# EAGLE board motor (EAGLE 9.7.0)
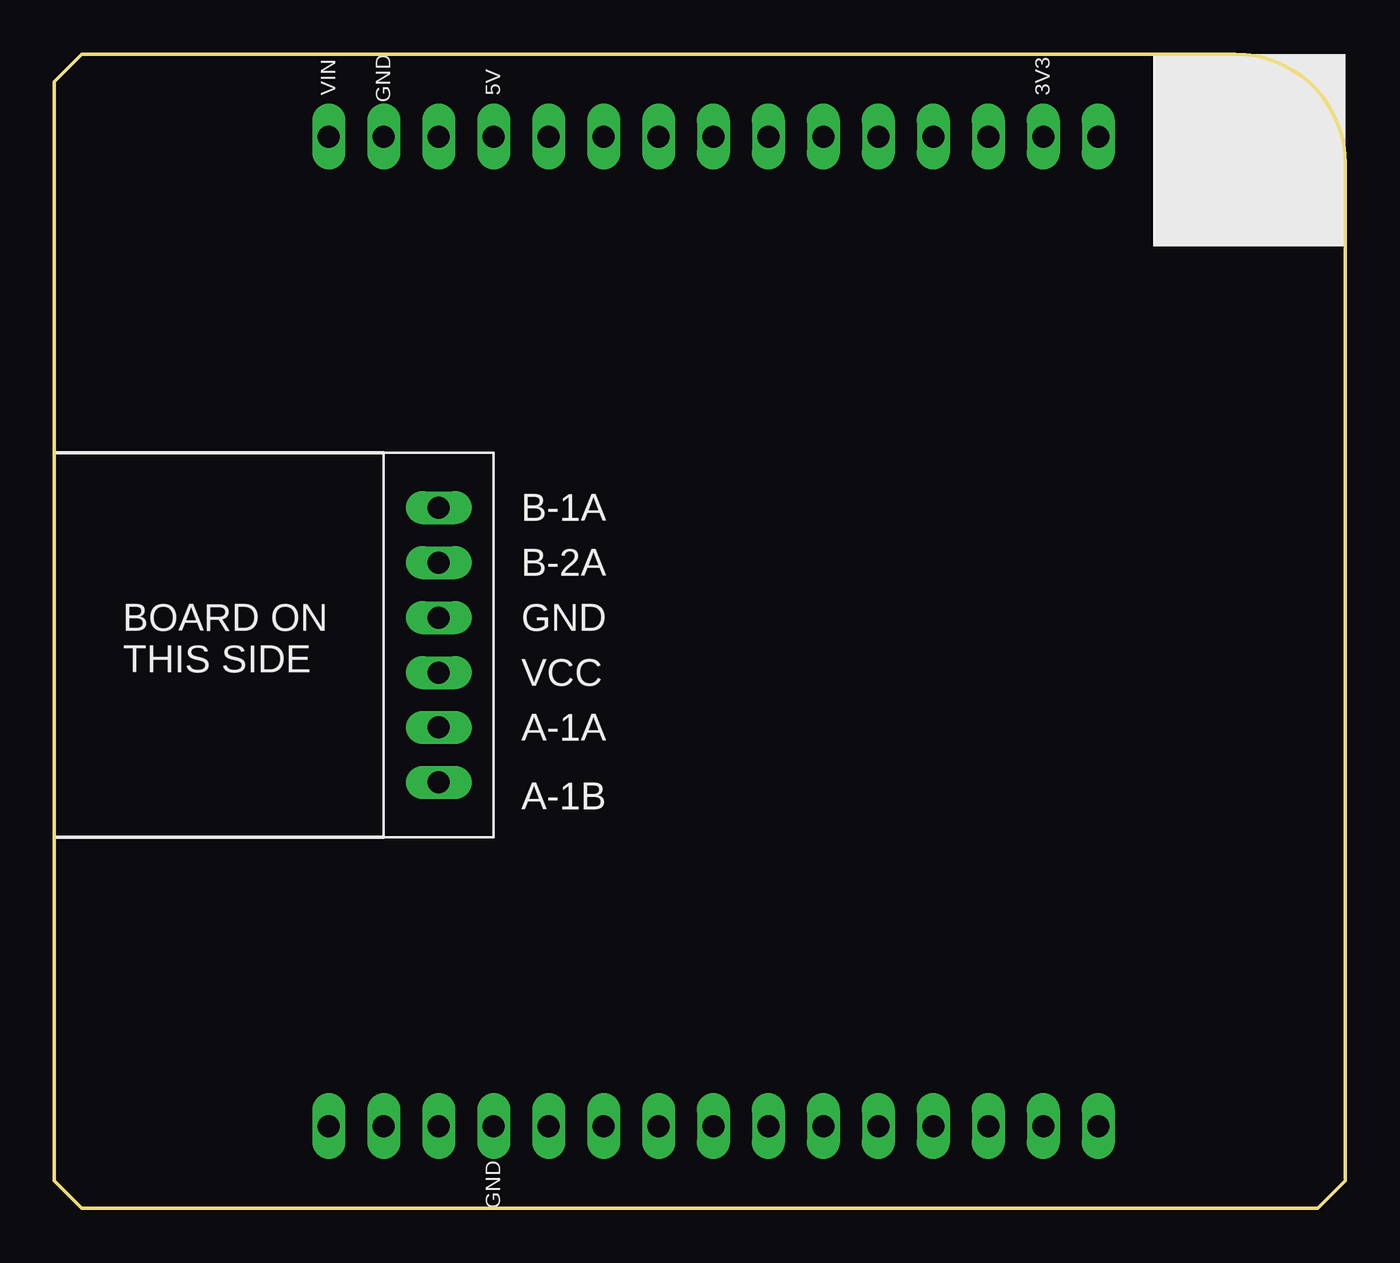
[diagram p0: board, top side]
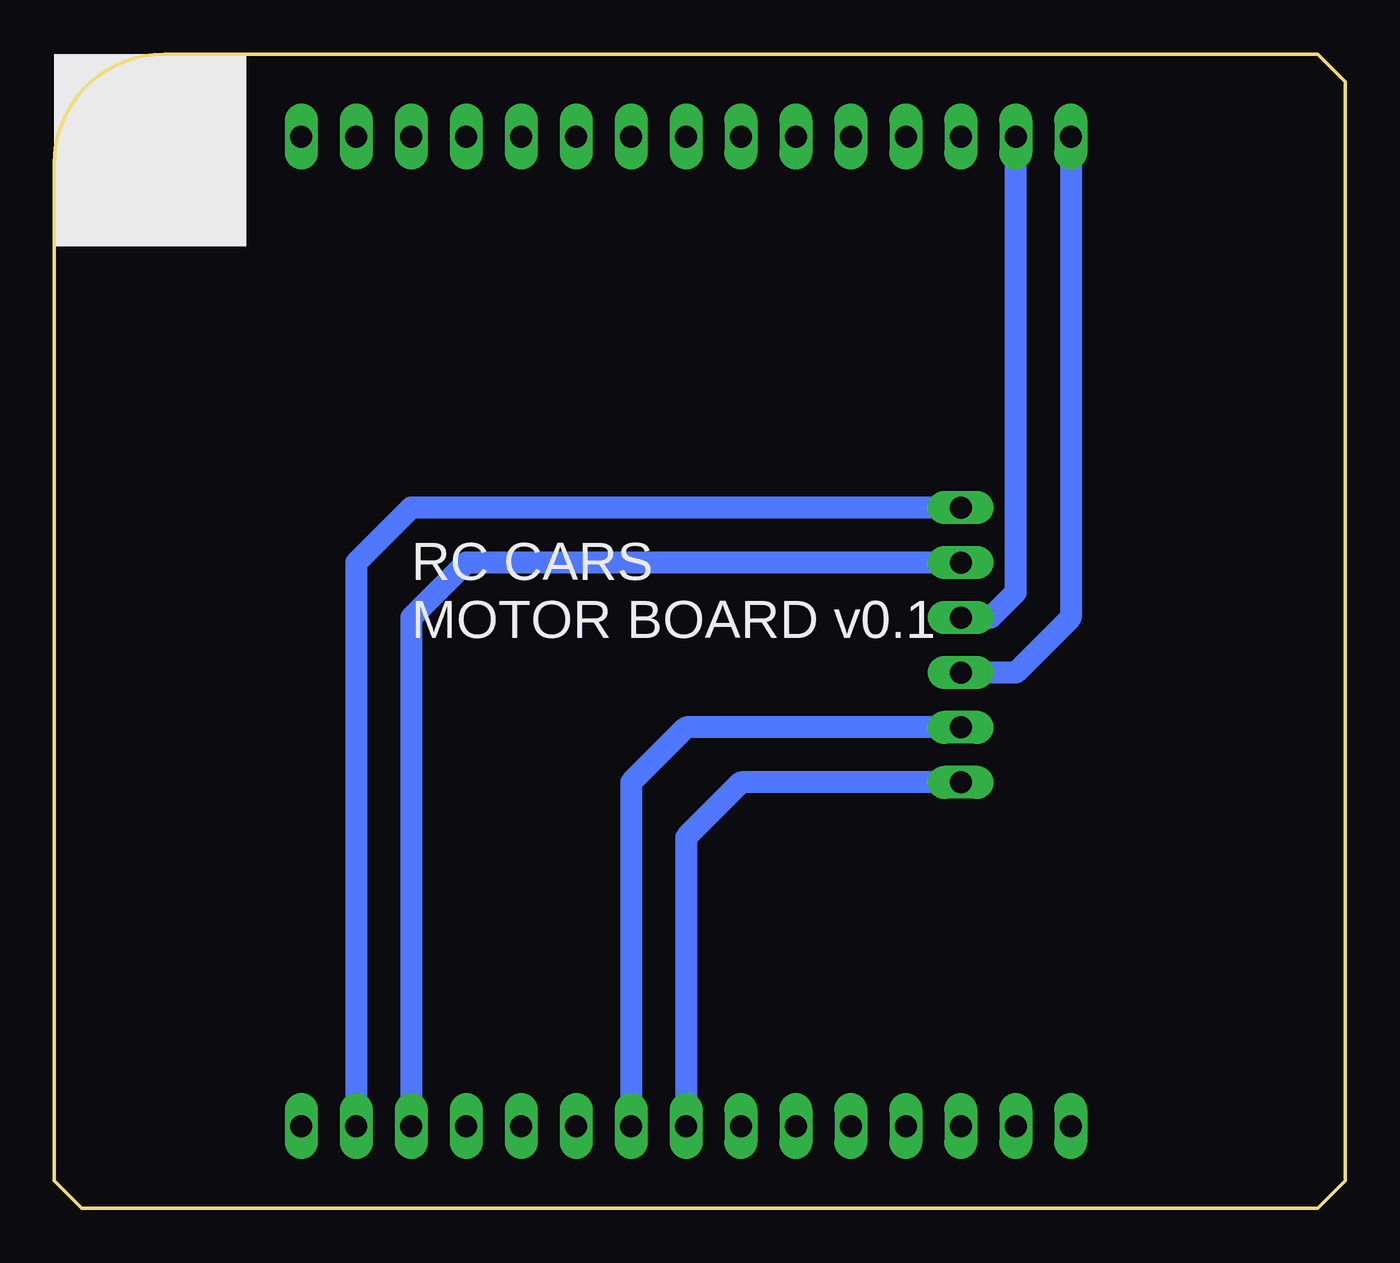
[diagram p1: board, bottom side, seen from below]

Size 59.69 x 53.34 mm. Coordinates in mm from the lower left corner, seen from the top.
Outline: 59.69,1.27 59.69,48.26 arc90 54.61,53.34 1.27,53.34 0,52.07 0,1.27 1.27,0 58.42,0 59.69,1.27
Copper layers (1*16): Top 0.035mm / dielectric 1.5mm / Bottom 0.035mm
Design rules "default": minimum track width 6mil, minimum drill 0.35mm, track to track 6mil, track to pad 6mil, pad to pad 6mil, via to via 6mil, smd to smd 6mil, copper to edge 40mil, drill to drill 6mil, minimum pad ring 10mil, minimum via ring 8mil, stop-mask expansion 4mil, vias tented up to drill 0mil, thermal gap 10mil

## Footprints (pad centres in the part's own frame; a part is rotated, then mirrored left to right if it is on the bottom)
ARDUINO-NANO-JUMPER-1 = drill 1.016 long: D2 7.62,0; D3 5.08,0; D4 2.54,0; D5 0,0; D6 -2.54,0; D7 -5.08,0; D8 -7.62,0; D9 -10.16,0; D10 -12.7,0; D11 -15.24,0; D12 -17.78,0; GND 10.16,0; RST 12.7,0; RX0 15.24,0; TX1 17.78,0
L9100S = drill 1.016 long: A-1A 2.54,0; A-1B 5.08,0; B-1A -7.62,0; B-2A -5.08,0; GND -2.54,0; VCC 0,0
ARDUINO-NANO-JUMPER-2 = drill 1.016 long: 3V3 -15.24,0; 5V 10.16,0; A0 -10.16,0; A1 -7.62,0; A2 -5.08,0; A3 -2.54,0; A4 0,0; A5 2.54,0; A6 5.08,0; A7 7.62,0; D13 -17.78,0; GND 15.24,0; REF -12.7,0; RST 12.7,0; VIN 17.78,0

## Placement (x,y rotation side)
U$1  ARDUINO-NANO-JUMPER-1  [ARDUINO-NANO-JUMPER-1]  30.48,3.81 180 top
U$2  L9110S  [L9100S]  17.78,24.77 270 top
U$7  ARDUINO-NANO-JUMPER-2  [ARDUINO-NANO-JUMPER-2]  30.48,49.53 180 top

## Library data of the parts
U$1 U$2 U$7 = RC Car

## Nets
D05: U$1.D5 U$2.A-1B
D06: U$1.D6 U$2.A-1A
GND: U$2.GND U$7.GND
N$3: U$1.D11 U$2.B-1A
N$4: U$1.D10 U$2.B-2A
N$5: U$2.B-1A
VIN: U$2.VCC U$7.VIN

## Tracks (layer width: path | path; a pad name or v marks a point on that pad's centre or on a via)
D05
  Bottom 1.016: U$2.A-1B 27.94,19.68 30.48,17.14 U$1.D5
D06
  Bottom 1.016: U$2.A-1A 30.48,22.23 33.02,19.68 U$1.D6
GND
  Bottom 1.016: U$2.GND 16.41,27.3 15.24,28.47 U$7.GND
N$3
  Bottom 1.016: U$2.B-1A 43.18,32.38 45.72,29.84 U$1.D11
N$4
  Bottom 1.016: U$2.B-2A 40.64,29.84 43.18,27.3 U$1.D10
VIN
  Bottom 1.016: U$7.VIN 12.7,27.3 15.24,24.77 U$2.VCC

## Text on the board
tPlace: VIN | GND | 5V | 3V3 | B-1A | B-2A | GND | BOARD ON / THIS SIDE | VCC | A-1A | A-1B | GND
bPlace: RC CARS / MOTOR BOARD v0.1